# Altium PCB 模型主控V31.PcbDoc (part 1 of 2)
Units mil, origin at the board's own origin, x right, y up, seen from the top; angles counter-clockwise.
Board outline 1613.6 x 1060.03 mil, 4 copper layers (Top Layer, Mid-Layer 1, Mid-Layer 2, Bottom Layer); 72 components, 81 nets, 272 pads, 75 vias.
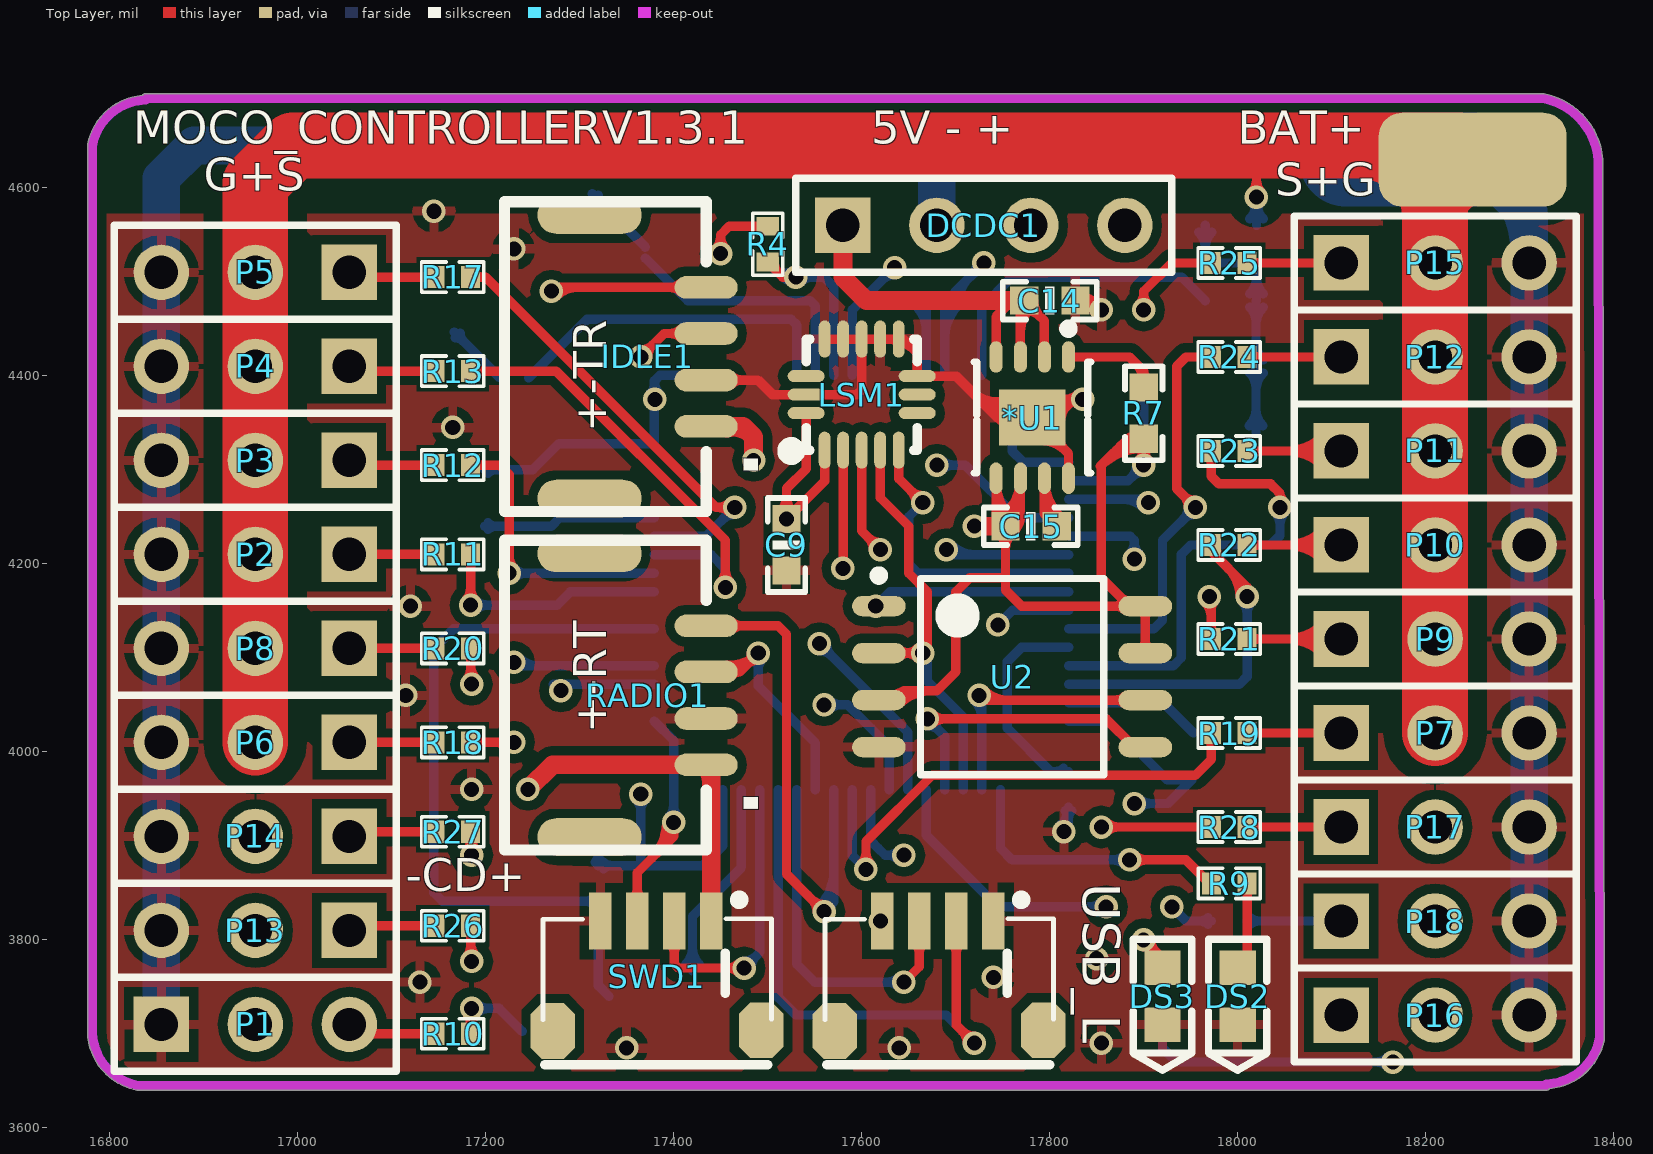
[diagram p0: Top Layer view]
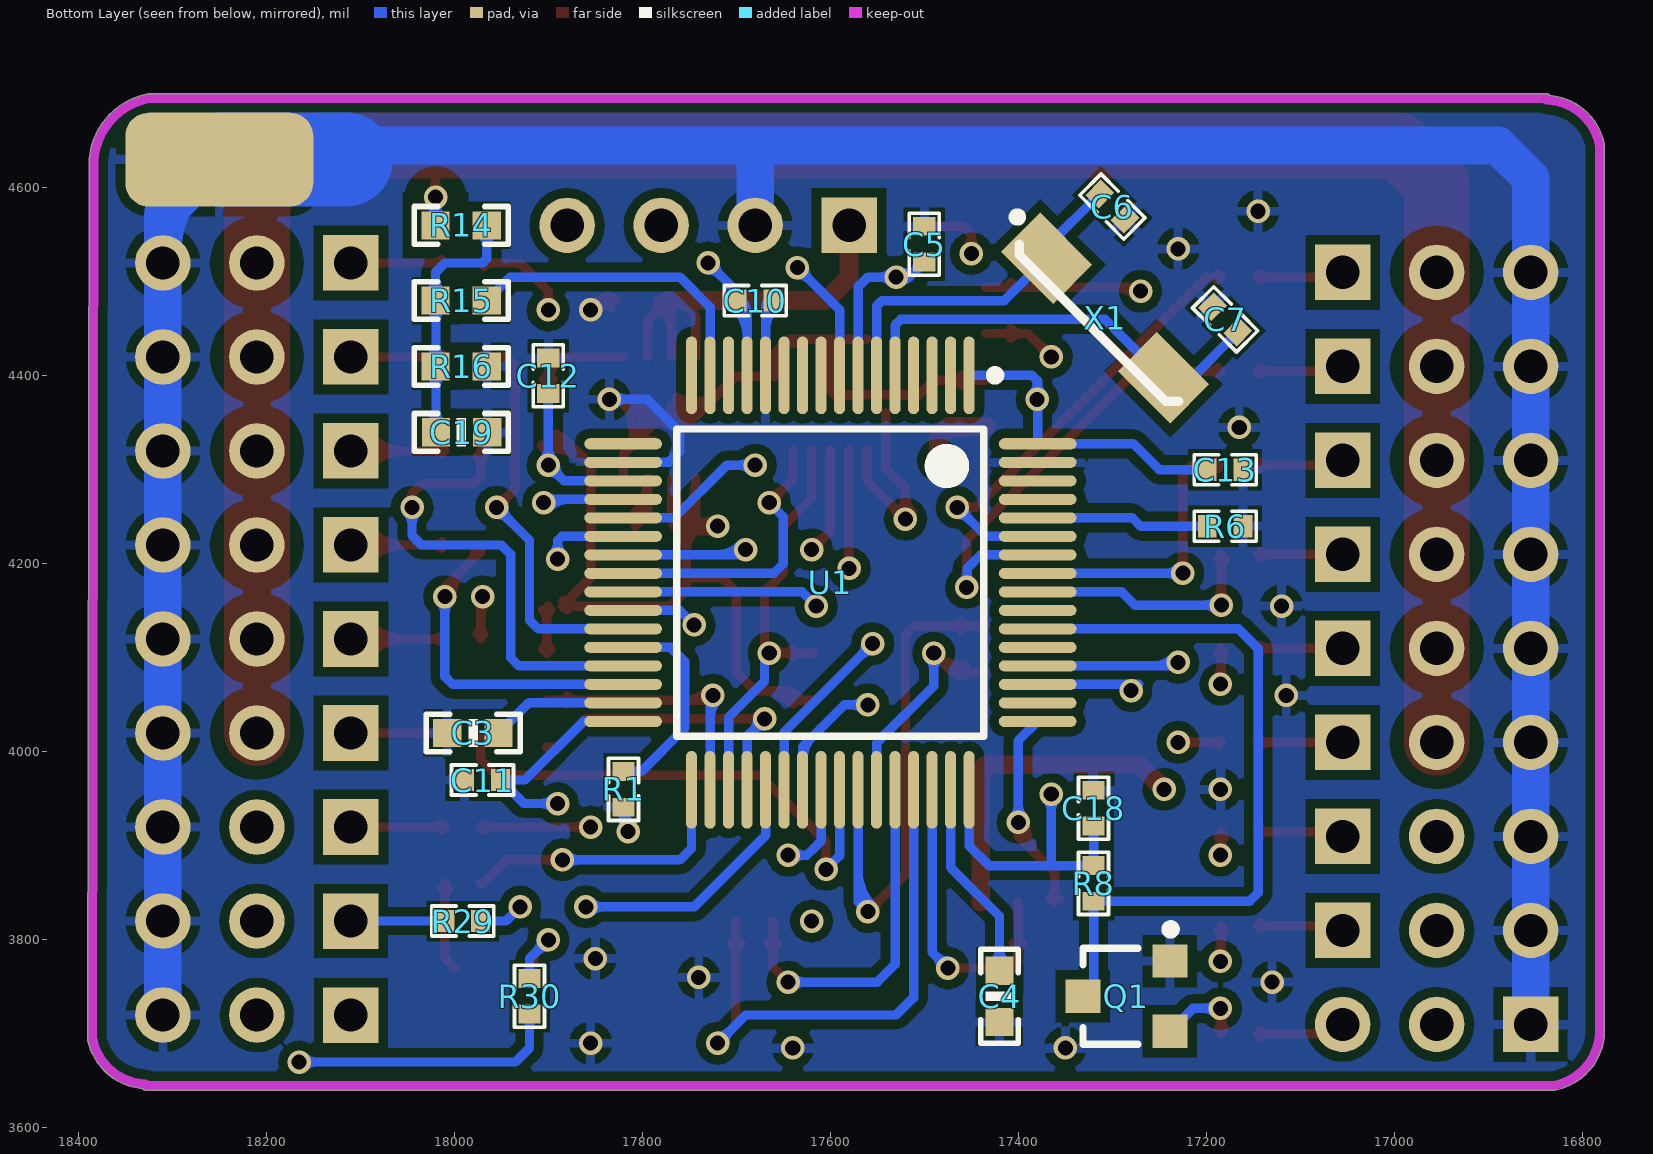
[diagram p1: Bottom Layer view, seen from below]
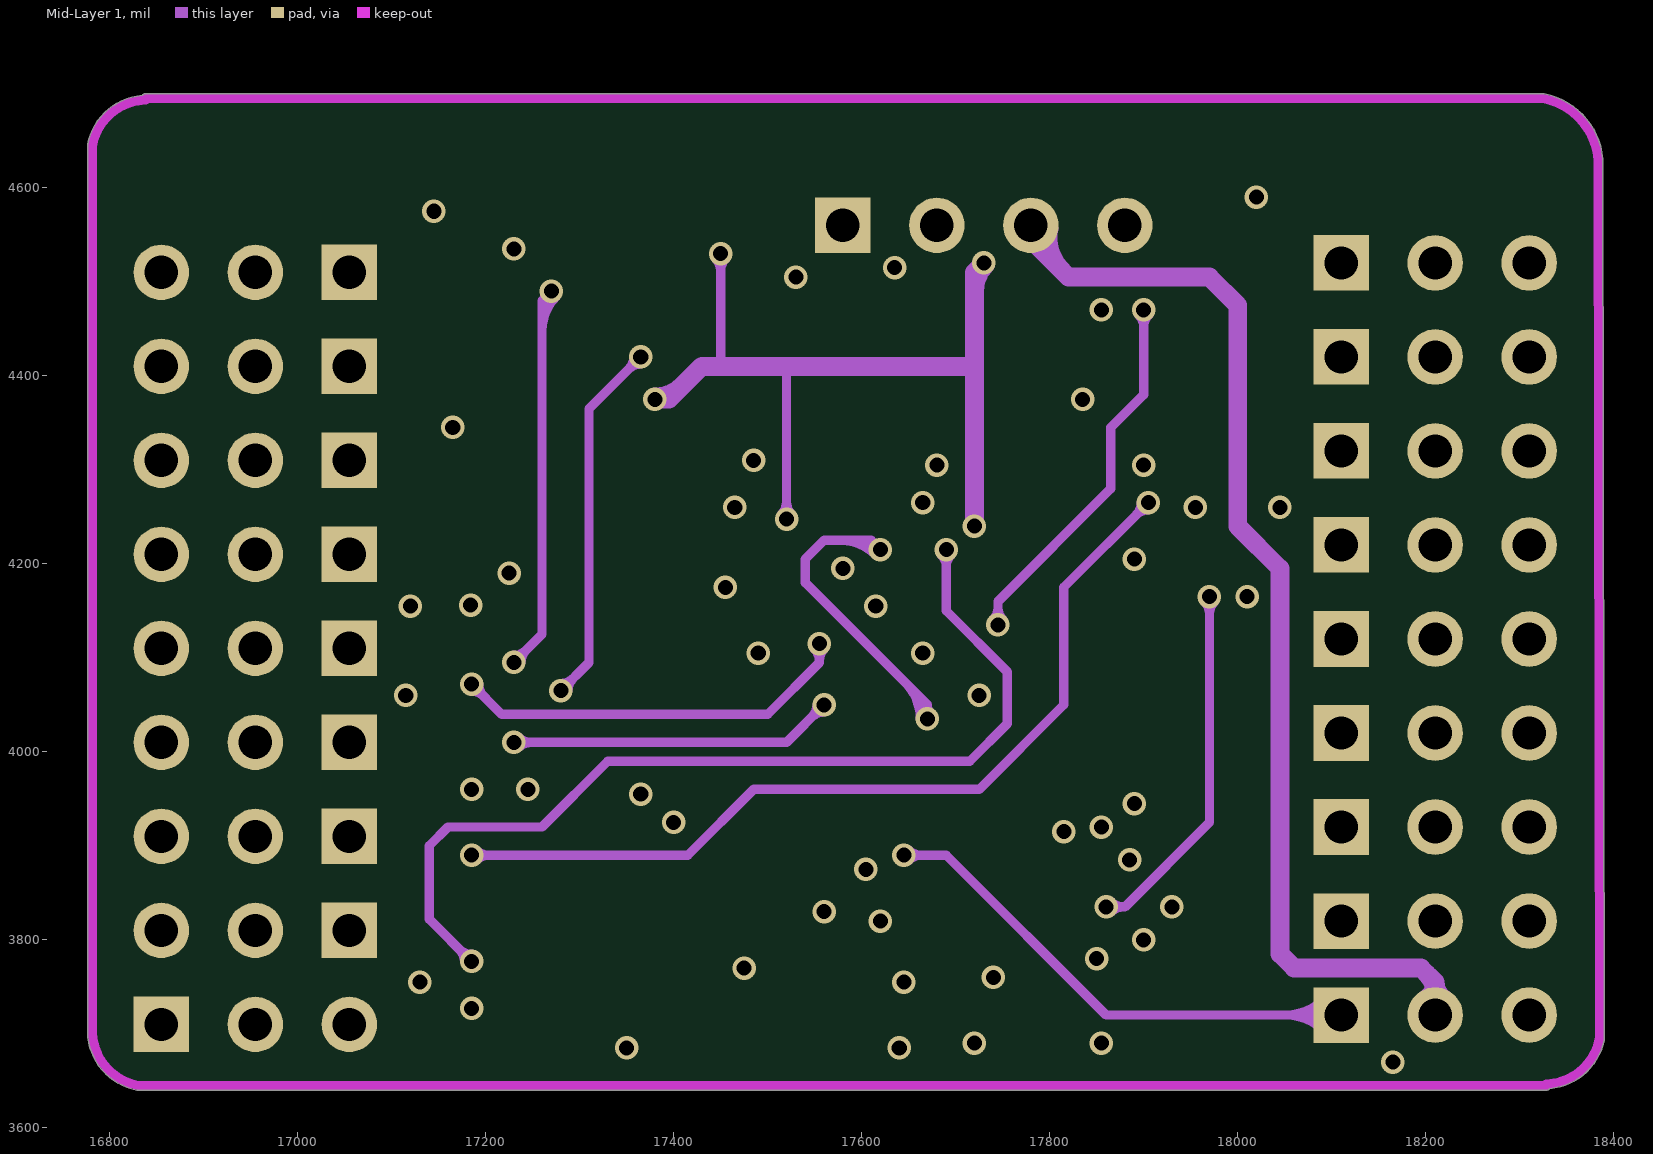
[diagram p2: Mid-Layer 1]
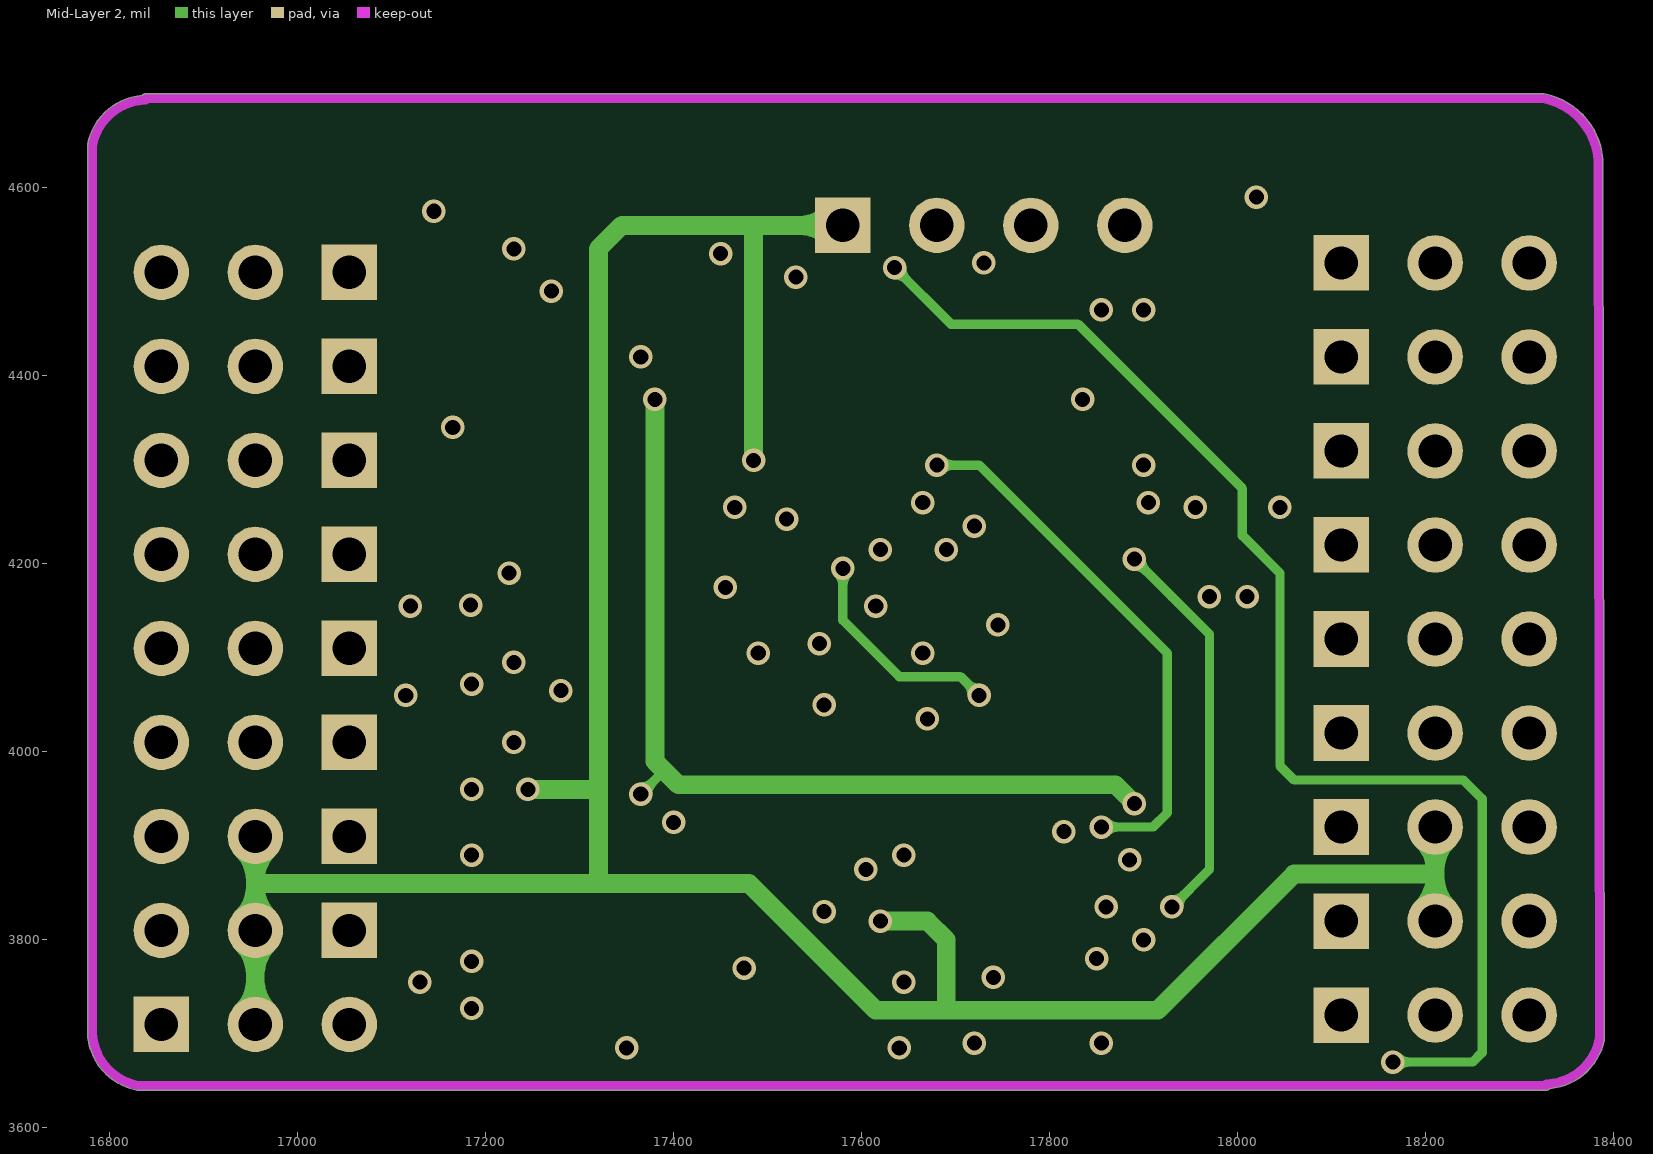
[diagram p3: Mid-Layer 2]
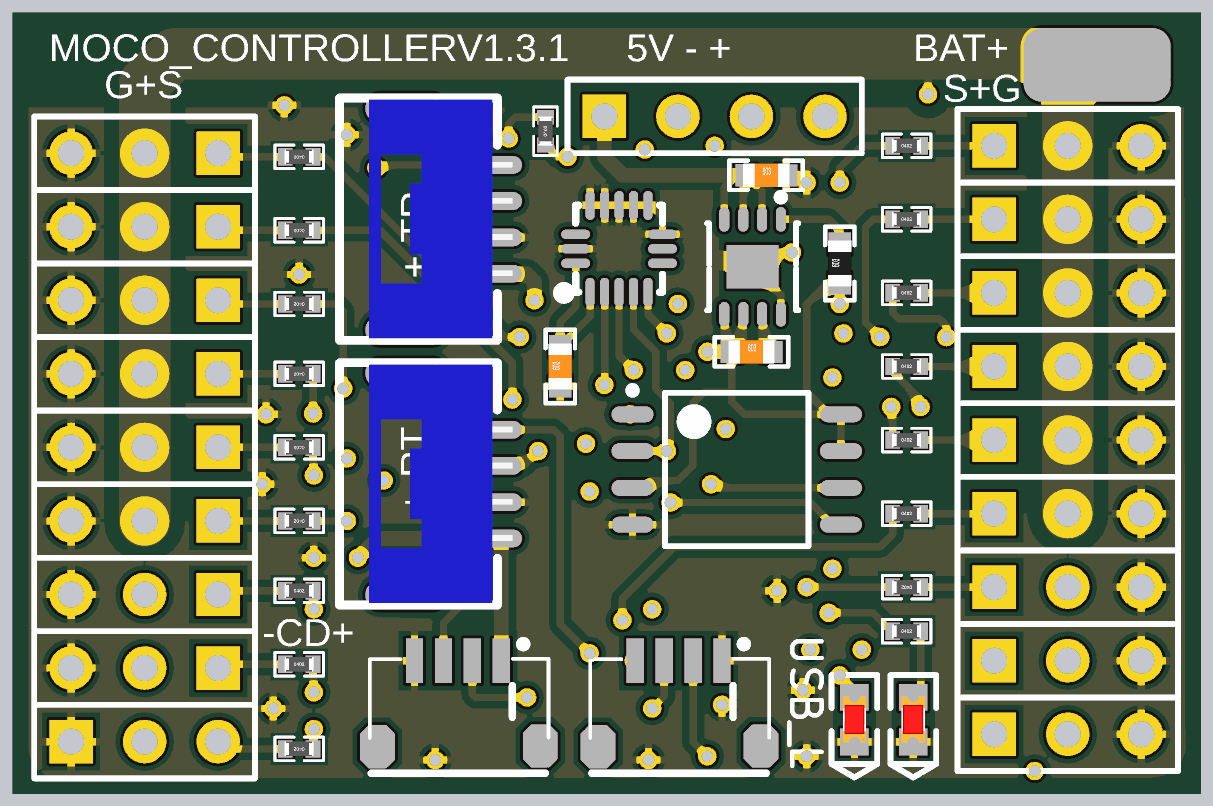
[diagram p5: 3D render of the assembled board from above, using the file's embedded part models]
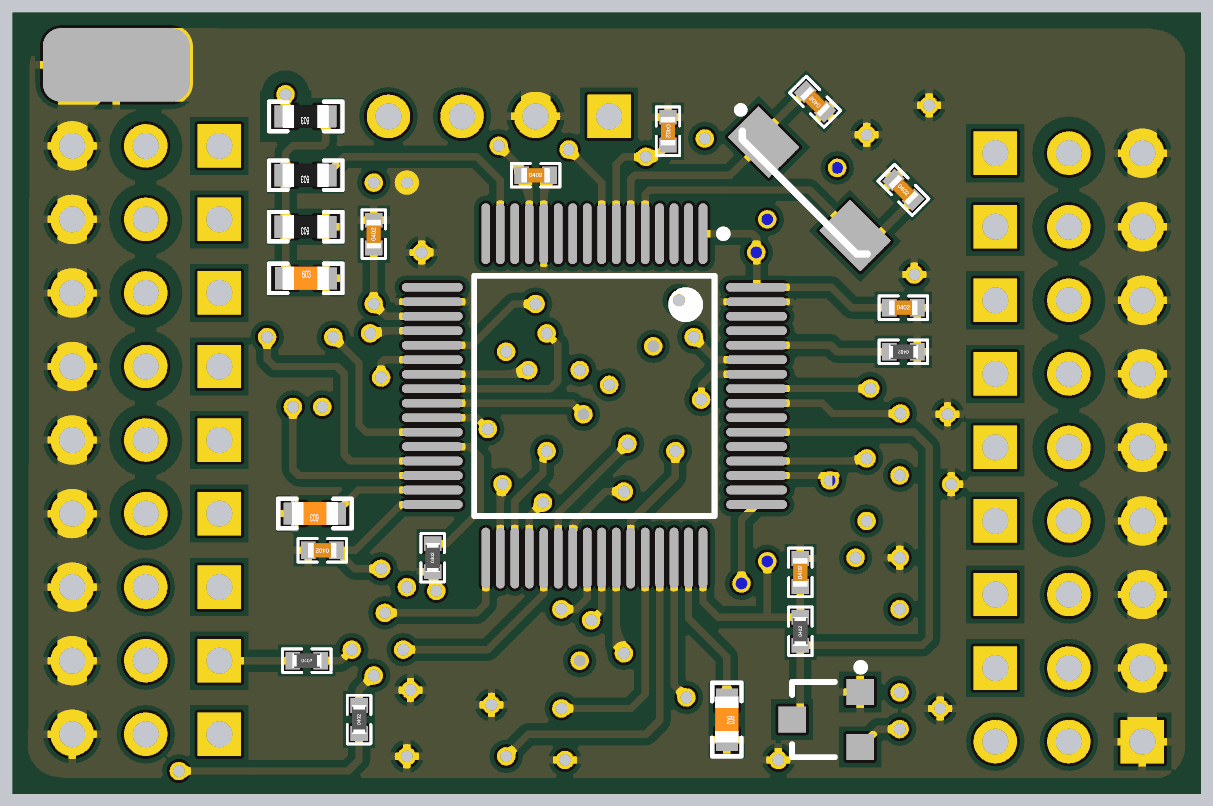
[diagram p6: 3D render of the assembled board from below, using the file's embedded part models]

## Layer stack, top to bottom
Top Layer: signal copper 1.4
Dielectric: core 12.6, FR-4, Dk 4.8
Mid-Layer 1: signal copper 1.4
Dielectric: prepreg 12.6, FR-4, Dk 4.8
Mid-Layer 2: signal copper 1.4
Dielectric: core 12.6, FR-4, Dk 4.8
Bottom Layer: signal copper 1.4

## Board outline
16776.54,3701.76 ccw(c16841.07,3703.5) 16829.07,3640.07 ccw(c16830,3645) 16830,3639.99 18328.11,3639.99 ccw(c18328.11,3645) 18331.92,3641.74 ccw(c18326.5,3706.07) 18389.71,3692.98 ccw(c18385.12,3695) 18390.14,3695 18390.14,3695.01 18388.38,4629.88 ccw(c18383.38,4630.3) 18388.4,4630.3 ccw(c18383.38,4630.3) 18388.38,4630.73 ccw(c18311.61,4624.23) 18325.93,4699.93 ccw(c18325,4695) 18325,4700.02 16838.44,4700.02 ccw(c16838.44,4695) 16834.63,4698.26 ccw(c16840.05,4633.93) 16776.62,4645.93 ccw(c16781.55,4645) 16776.54,4645 16776.54,3701.89 ccw(c16781.55,3701.89)

## Design rules (kind name [scope] priority, off if disabled: settings)
Clearance Clearance_2 [InNet('VCC_DJ') vs (InPolygon)] p1: gap=20
Clearance Clearance_1 [All vs (InPolygon)] p2: gap=10
Clearance [All] p3: gap=6
PolygonConnect [All] p1: connectstyle=Relief reliefconductorwidth=10 reliefentries=4 polygonreliefangle="90 Angle"
RoutingVias [All] p1: holewidth=28 width=50 viastyle="Through Hole" minholewidth=16 minwidth=25 maxholewidth=28 maxwidth=50
SilkscreenOverComponentPads [All] p1: minsilkscreentomaskgap=10
SolderMaskExpansion [All] p1: expansion=4
Width [All] p1: maxlimit=100 minlimit=10 preferedwidth=10 minimp=50.000000 maximp=50.000000 favimp=50.000000
27 further rules are at their usual default settings.

## Components (designator, comment, footprint, x,y, rotation, side; value= is the part's Value field where it differs from the comment)
*U1 "AS1364-BTDT-33" TDFN-8 17820,4420 r90 top
C3 "2.2UF" C0603 17980,4020 r0 bottom
C4 "2.2UF" C0603 17420,3740 r270 bottom
C5 "10NF" "C 0402" 17500,4540 r270 bottom
C6 "20PF" "C 0402" 17300,4580 r45 bottom
C7 "20PF" "C 0402" 17180,4460 r225 bottom
C9 "0.1UF" C0603 17520,4220 r90 top
C10 "0.1UF" "C 0402" 17680,4480 r180 bottom
C11 "0.1UF" "C 0402" 17970,3970 r0 bottom
C12 "0.1UF" "C 0402" 17900,4400 r90 bottom
C13 "0.1UF" "C 0402" 17180,4300 r180 bottom
C14 "4.7uf" C0603 17800,4480 r0 top
C15 "10nf" C0603 17780,4240 r0 top
C18 "0.1UF" "C 0402" 17320,3940 r90 bottom
C19 "100uF" C0603 17992.5,4339.94 r180 bottom
DCDC1 "Header 4" HDR1X4 17580,4560 r0 top
DS2 "LED1" 0603_LED 18000,3740 r90 top
DS3 "LED1" 0603_LED 17920,3740 r90 top
IDLE1 "Header 4" JST_GH_V4 17220,4420 r90 top
LSM1 "LSM6DS33" LSM6DS33 17600,4380 r90 top
P1 "Header 3" HDR1X3 16855,3710 r0 top
P2 "Header 3" HDR1X3 17055,4210 r180 top
P3 "Header 3" HDR1X3 17055,4310 r180 top
P4 "Header 3" HDR1X3 17055,4410 r180 top
P5 "Header 3" HDR1X3 17055,4510 r180 top
P6 "Header 3" HDR1X3 17055,4010 r180 top
P7 "Header 3" HDR1X3 18110,4020 r0 top
P8 "Header 3" HDR1X3 17055,4110 r180 top
P9 "Header 3" HDR1X3 18110,4120 r0 top
P10 "Header 3" HDR1X3 18110,4220 r0 top
P11 "Header 3" HDR1X3 18110,4320 r0 top
P12 "Header 3" HDR1X3 18110,4420 r0 top
P13 "Header 3" HDR1X3 17055,3810 r180 top
P14 "Header 3" HDR1X3 17055,3910 r180 top
P15 "Header 3" HDR1X3 18110,4520 r0 top
P16 "Header 3" HDR1X3 18110,3720 r0 top
P17 "Header 3" HDR1X3 18110,3920 r0 top
P18 "Header 3" HDR1X3 18110,3820 r0 top
Q1 "S8050" SOT-23R 17280,3740 r90 bottom
R1 "10K" "R 0402" 17820,3960 r90 bottom
R4 "10K" "R 0402" 17500,4540 r90 top
R6 "10K" "R 0402" 17180,4240 r0 bottom
R7 "100K" R0603 17900,4360 r90 top
R8 "10K" "R 0402" 17320,3860 r90 bottom
R9 "100R" "R 0402" 17991,3860 r0 top
R10 "560R" "R 0402" 17165,3700 r180 top
R11 "560R" "R 0402" 17165,4210 r180 top
R12 "560R" "R 0402" 17165,4305 r180 top
R13 "560R" "R 0402" 17165,4405 r180 top
R14 "10K" R0603 17992.5,4559.94 r0 bottom
R15 "1K" R0603 17992.5,4479.94 r0 bottom
R16 "1K" R0603 17992.5,4409.94 r0 bottom
R17 "560R" "R 0402" 17165,4505 r180 top
R18 "560R" "R 0402" 17165,4010 r180 top
R19 "560R" "R 0402" 17991,4020 r0 top
R20 "560R" "R 0402" 17165,4110 r180 top
R21 "560R" "R 0402" 17991,4120 r0 top
R22 "560R" "R 0402" 17991,4220 r0 top
R23 "560R" "R 0402" 17991,4320 r0 top
R24 "560R" "R 0402" 17991,4420 r0 top
R25 "560R" "R 0402" 17991,4520 r0 top
R26 "1K" "R 0402" 17165,3815 r0 top
R27 "1K" "R 0402" 17165,3915 r0 top
R28 "1K" "R 0402" 17991,3920 r180 top
R29 "1K" "R 0402" 17991,3820 r180 bottom
R30 "100R" "R 0402" 17920,3740 r90 bottom
RADIO1 "Header 4" JST_GH_V4 17220,4060 r90 top
SWD1 "Header 4" "SH1.0-4P - up" 17440,3820 r180 top
U1 "STM32F405RGT6" LQFP64_M 17600,4180 r270 bottom locked
U2 "W25X16" W25Q32FVZPIG 17760,4080 r0 top locked
USB_L "Header 4" "SH1.0-4P - up" 17740,3820 r180 top
X1 "8MHZ" PXCL 17370,4525 r315 bottom

## Footprints (in the part's own frame and the unit in brackets; to place one, negate y for a bottom-side part, rotate by r counter-clockwise, add the part's x,y. Pads: shape width x height; smd on the part's side, far side on the other; paste and mask are expansions set on the pad)
0603_LED [mm]
  rect 0.93x0.98 smd: 1(0.77,0) 2(-0.77,0)
  silkscreen extent -2,-0.79 1.53,0.79, body extent -0.8,-0.4 0.8,0.4, height 0.6
C0603 [mil]
  rect 30x30 smd: 1(-27,0) 2(27.5,-0.06)
  silkscreen extent -50,-20 50,20, body extent -31,-16 31,16, height 12
"C 0402" [mil]
  rect 20x23.62 smd: 1(-19,0) 2(19,0)
  silkscreen extent -33,-16 33,16, body extent -20,-10 20,10, height 20
HDR1X3 [mm] "Connector; Header; 3 Position"
  rect 1.5x1.5 hole 0.9: 1(0,0)
  round 1.5 hole 0.9: 2(2.54,0) 3(5.08,0)
  silkscreen extent -1.27,-1.27 6.35,1.27
HDR1X4 [mm] "Connector; Header; 4 Position"
  rect 1.5x1.5 hole 0.9: 1(0,0)
  round 1.5 hole 0.9: 2(2.54,0) 3(5.08,0) 4(7.62,0)
  silkscreen extent -1.27,-1.27 8.89,1.27
JST_GH_V4 [mil]
  rrect100% 24x67 smd: 1(-73.82,-214.57) 2(-24.61,-214.57) 3(25,-214.57) 4(74,-214.57)
  rrect100% 40x111 smd: GND(-150.59,-90.55) GND(151,-90.55)
  silkscreen extent -164,-215 165,0, body extent -162,-235 163,-40, height 165
LQFP64_M [mm] "Thin QFP, 64-Leads, Body 10x10mm, Pitch 0.5mm, IPC Low Density"
  oval 2.1x0.3 smd: 1(-5.6,3.75) 2(-5.6,3.25) 3(-5.6,2.75) 4(-5.6,2.25) 5(-5.6,1.75) 6(-5.6,1.25) 7(-5.6,0.75) 8(-5.6,0.25) 9(-5.6,-0.25) 10(-5.6,-0.75) 11(-5.6,-1.25) 12(-5.6,-1.75) 13(-5.6,-2.25) 14(-5.6,-2.75) 15(-5.6,-3.25) 16(-5.6,-3.75) 33(5.6,-3.75) 34(5.6,-3.25) 35(5.6,-2.75) 36(5.6,-2.25) 37(5.6,-1.75) 38(5.6,-1.25) 39(5.6,-0.75) 40(5.6,-0.25) 41(5.6,0.25) 42(5.6,0.75) 43(5.6,1.25) 44(5.6,1.75) 45(5.6,2.25) 46(5.6,2.75) 47(5.6,3.25) 48(5.6,3.75)
  oval 0.3x2.1 smd: 17(-3.75,-5.6) 18(-3.25,-5.6) 19(-2.75,-5.6) 20(-2.25,-5.6) 21(-1.75,-5.6) 22(-1.25,-5.6) 23(-0.75,-5.6) 24(-0.25,-5.6) 25(0.25,-5.6) 26(0.75,-5.6) 27(1.25,-5.6) 28(1.75,-5.6) 29(2.25,-5.6) 30(2.75,-5.6) 31(3.25,-5.6) 32(3.75,-5.6) 49(3.75,5.6) 50(3.25,5.6) 51(2.75,5.6) 52(2.25,5.6) 53(1.75,5.6) 54(1.25,5.6) 55(0.75,5.6) 56(0.25,5.6) 57(-0.25,5.6) 58(-0.75,5.6) 59(-1.25,5.6) 60(-1.75,5.6) 61(-2.25,5.6) 62(-2.75,5.6) 63(-3.25,5.6) 64(-3.75,5.6)
  silkscreen extent -5.72,-4.15 4.15,4.57, body extent -5,-5 5,5, height 1.6
LSM6DS33 [mm]
  oval 1x0.32 smd: 1(-1.5,1) 2(-1.5,0.5) 3(-1.5,0) 4(-1.5,-0.5) 5(-1.5,-1) 9(1.5,-1) 10(1.5,-0.5) 11(1.5,0) 12(1.5,0.5) 13(1.5,1)
  oval 0.32x1 smd: 6(-0.5,-1.5) 7(0,-1.5) 8(0.5,-1.5) 14(0.5,1.5) 15(0,1.5) 16(-0.5,1.5)
  silkscreen extent -1.65,-1.5 1.5,2.03, body extent -1.5,-1.5 1.5,1.5, height 0.75
PXCL [mm]
  rect 1.5x2 smd: 1(0,0) 2(0.051,4.521)
  silkscreen extent -0.34,-1.45 0.46,5.26
R0603 [mil]
  rect 30x30 smd: 1(-27,0) 2(27.5,-0.06)
  silkscreen extent -50,-20 50,20, body extent -31,-16 31,16, height 12
"R 0402" [mil]
  rect 20x23.62 smd: 1(-19,0) 2(19,0)
  silkscreen extent -33,-16 33,16, body extent -20,-10 20,10, height 12
"SH1.0-4P - up" [mm]
  rect 0.6x1.55 smd: 1(0,0) 2(1,0) 3(2,0) 4(3,0)
  oct 1.2x1.5 smd: 1.(4.279,2.972) A(-1.346,2.946)
  silkscreen extent -1.63,-0.7 4.55,3.89
SOT-23R [mm]
  rect 0.9x0.95 smd: 1(0.95,-1.048) 2(-0.95,-1.048) 3(0,1.302)
  silkscreen extent -1.3,-1.19 1.93,1.3
TDFN-8 [mm] "QFN, 8-Leads, Body 3.0x3.0mm (max), Pitch 0.65mm, IPC Medium Density"
  oval 0.85x0.35 smd: 1(0,0) 2(0,0.65) 3(0,1.3) 4(0,1.956) 5(-3.277,1.956) 6(-3.277,1.295) 7(-3.277,0.65) 8(-3.277,0.001)
  rect 1.5x1.8 smd: 9(-1.636,0.975)
  silkscreen extent -3.14,-0.6 0.89,2.55, body extent -3.14,-0.52 -0.14,2.48, height 0.8
W25Q32FVZPIG [mm] "SOP, 8-Leads, Body 5.3x5.3mm (max), Pitch 1.27mm, IPC Medium Density"
  oval 1.45x0.55 smd: 1(-3.6,1.905) 2(-3.6,0.635) 3(-3.6,-0.635) 4(-3.6,-1.905) 5(3.6,-1.905) 6(3.6,-0.635) 7(3.6,0.635) 8(3.6,1.905)
  silkscreen extent -3.72,-2.65 2.47,2.85, body extent -2.64,-2.64 2.64,2.64, height 2.65

## Part data
*U1: library part AS1364-3.3V
C3 C4: library part CAP1, "胆电容"
C5 C9 C10 C11 C12 C13 C14 C15 C18 C19: library part CAP, "Capacitor"
C6 C7: library part C2, "0805"
DCDC1 IDLE1 RADIO1 SWD1 USB_L: "Header, 4-Pin"
DS2 DS3: library part LED2, "Typical RED, GREEN, YELLOW, AMBER GaAs LED"
P1 P2 P3 P4 P5 P6 P7 P8 P9 P10 P11 P12 P13 P14 P15 P16 P17 P18: "Header, 3-Pin"
Q1: library part NPN, "8050/BCW846/BCW847"
R1 R4 R6 R8 R9 R10 R11 R12 R13 R14 R15 R16 R17 R18 R19 R20 R21 R22 R23 R24 R25 R30: library part Res2, "0603"
R7 R26 R27 R28 R29: library part Res1, "Resistor"
U2: "W25X16;SST25VF016;MX25L1605"
X1: library part XTAL, "Crystal Oscillator"

## Free pads (board coordinates)
  rrect50% 200x100 smd: 0(18250,4630)
  rrect50% 200x100 smd far side: 0(18250,4630)

## Via types
v1: diameter 25, hole 16, Top Layer to Bottom Layer, 75 vias

## Nets (pads, with @x,y where several pads share a name; then routed paths per layer and width w, separated by ;. In a path a pad name is that pad's centre, name@x,y a point inside that pad or via, vN(x,y) a via of type N, cw(c..) or ccw(c..) an arc to the next point about the centre after c; other vN are vias at no path point)
3.3V: *U1.5 *U1.6 C9.2 C10.1 C11.1 C12.1 C13.1 C15.1 C18.1 LSM1.1 LSM1.16 R4.2 R7.1 R8.2 U1.1 U1.13 U1.19 U1.32 U1.48 U1.64 U2.3 U2.7 U2.8 | length 5548.4
  Top Layer w10: v1@17444.7,4535.3 ccw(c17431.89,4548.11) 17450,4548.11 ccw(c17468.11,4548.11) v1@17455.3,4535.3 ; v1(17450,4530) 17450,4550 17459,4559 R4.2@17500,4559 ; R4.2@17494.65,4555.46 ccw(c17486.12,4546.93) 17486.12,4559 ccw(c17486.12,4571.07) R4.2@17494.65,4562.54 ; C9.2@17512.99,4254.57 ccw(c17495.92,4271.64) 17520.06,4271.64 ccw(c17544.21,4271.64) C9.2@17527.14,4254.57 ; C9.2@17514.76,4252.8 ccw(c17501.96,4265.61) 17520.06,4265.61 ccw(c17538.17,4265.61) C9.2@17525.37,4252.8 ; C9.2@17520.06,4255 ccw(c17520.06,4273.11) 17532.87,4260.3 ccw(c17545.67,4247.5) C9.2@17527.56,4247.5 ; LSM1.16@17540.94,4360.31 17540.94,4350 17540.94,4300.94 17520.06,4280.06 v1(17520.06,4247.5) 17560.63,4288.07 LSM1.1@17560.63,4320.94 ; U2.3@17618.27,4055 17635,4055 17645,4065 ; U2.3@17633.03,4057.95 cw(c17650.05,4040.93) 17650.05,4065 ; U2.3@17635.98,4060.83 ccw(c17635.98,4072.52) 17644.25,4064.25 ; U2.3@17640.1,4050.88 cw(c17674.19,4016.79) 17674.19,4065 ; U2.3@17641.77,4055.69 cw(c17652.98,4057.01) 17645,4065 ; 17743,4264.14 ccw(c17777.14,4264.14) C15.1@17753,4240 ; *U1.5@17743,4288.28 ccw(c17801.28,4288.28) C15.1@17760.07,4247.07 ; *U1.5@17743,4291 17743,4242 17745,4240 C15.1@17753,4240 ; C15.1@17745.93,4232.93 cw(c17728.86,4215.86) 17753,4215.86 cw(c17777.14,4215.86) C15.1@17760.07,4232.93 ; C15.1@17747.13,4248.09 ccw(c17715.98,4291) *U1.6@17769,4291 17769,4256 ; C15.1@17753.47,4249.99 ccw(c17754.43,4270.56) 17769,4256 ; C15.1@17758.87,4231.91 ccw(c17744.46,4251.77) 17769,4251.77 ; C15.1@17762.99,4240.47 cw(c17783.56,4241.43) 17769,4256 ; 17769,4271.38 cw(c17730.22,4271.38) C15.1@17753,4240 ; 17853.91,4303.91 cw(c17900,4257.82) R7.1@17900,4323 ; 17870.98,4320.98 cw(c17900,4291.96) R7.1@17900,4333 ; 17873.37,4166.63 cw(c17861.75,4155) U2.8@17878.19,4155 ; 17874.5,4324.5 cw(c17884.49,4314.51) R7.1@17893.58,4325.34 ; 17875.75,4164.25 ccw(c17884.02,4172.52) U2.8@17884.02,4160.83 ; U2.8@17879.9,4150.88 ccw(c17869.95,4140.93) 17869.95,4155 ccw(c17869.95,4169.07) U2.8@17879.9,4159.12 ; 17882.22,4332.22 cw(c17891.54,4322.9) R7.1@17900,4333 ; R7.1@17891.26,4328.14 ccw(c17883,4323.55) 17883,4333 ; R7.1@17891.26,4337.86 cw(c17883,4342.45) 17883,4333 ; R7.1@17892.93,4325.93 cw(c17875.86,4308.86) 17900,4308.86 cw(c17924.14,4308.86) R7.1@17907.07,4325.93 ; v1@17894.7,4310.3 ccw(c17881.89,4323.11) 17900,4323.11 ccw(c17918.11,4323.11) v1@17905.3,4310.3 ; U2.7@17897.61,4109.12 ccw(c17887.67,4119.07) 17901.73,4119.07 ccw(c17915.8,4119.07) U2.7@17905.85,4109.12 ; U2.8@17900,4155 17900,4146.73 17901.73,4145 17901.73,4140 U2.7@17901.73,4105 ; v1(17900,4305) R7.1@17900,4333 ; 17645,4065 17680,4065 17700,4085 17700,4170 17715,4185 17753,4185 ; 17753,4185 17753,4172 17770,4155 17885,4155 17855,4185 17855,4305 17883,4333 ; 17753,4185 C15.1@17753,4240 ; C15.1@17753,4240 17769,4256 ; 17883,4333 R7.1@17900,4333 ; U2.8@17897.61,4150.88 cw(c17887.67,4140.93) 17901.73,4140.93 ; U2.8@17897.61,4150.88 cw(c17887.67,4140.93) 17901.73,4140.93 ; U2.8@17897.61,4150.88 cw(c17887.67,4140.93) 17901.73,4140.93 ; 17901.73,4140.93 cw(c17915.8,4140.93) U2.8@17905.85,4150.88 ; 17901.73,4140.93 cw(c17915.8,4140.93) U2.8@17905.85,4150.88 ; 17901.73,4140.93 cw(c17915.8,4140.93) U2.8@17905.85,4150.88
  Top Layer w20: v1(17720,4240) C15.1@17753,4240
  Mid-Layer 1 w10: v1@17444.7,4524.7 cw(c17431.89,4511.89) 17450,4511.89 cw(c17468.11,4511.89) v1@17455.3,4524.7 ; 17450,4415 v1(17450,4530) ; v1@17514.76,4252.8 ccw(c17501.96,4265.61) 17520.06,4265.61 ccw(c17538.17,4265.61) v1@17525.37,4252.8 ; v1(17520.06,4247.5) 17520.06,4404.94
  Mid-Layer 1 w20: v1(17380,4375) 17395,4375 17430,4410 17720,4410 ; v1@17380,4377.5 ccw(c17380,4419.75) 17409.87,4389.87 ; v1(17720,4240) 17720,4410 ; 17720,4489.82 cw(c17760.18,4489.82) v1@17731.77,4518.23 ; v1(17730,4520) 17720,4510 17720,4410
  Mid-Layer 2 w10: v1(17365,3955) 17390,3980 ; v1@17365,3962.5 ccw(c17365,3980.61) 17377.8,3967.8 ccw(c17390.61,3955) v1@17372.5,3955
  Mid-Layer 2 w20: v1(17380,4375) 17380,3990 17390,3980 17405,3965 17870,3965 v1(17890,3945)
  Bottom Layer w10: C13.1@17199,4300 17250,4300 17277.64,4327.64 U1.64@17379.53,4327.64 17379.53,4394.53 17385.47,4400.47 U1.1@17452.36,4400.47 ; C13.1@17202.54,4296.46 cw(c17211.07,4287.93) 17211.07,4300 cw(c17211.07,4312.07) C13.1@17202.54,4303.54 ; R8.2@17316.46,3882.54 ccw(c17307.93,3891.07) 17320,3891.07 ccw(c17332.07,3891.07) R8.2@17323.54,3882.54 ; C18.1@17316.46,3917.46 cw(c17307.93,3908.93) 17320,3908.93 cw(c17332.07,3908.93) C18.1@17323.54,3917.46 ; C18.1@17320,3921 R8.2@17320,3879 17365,3879 ; R8.2@17325.35,3875.46 cw(c17333.88,3866.93) 17333.88,3879 cw(c17333.88,3891.07) R8.2@17325.35,3882.54 ; v1@17359.7,3949.7 cw(c17346.89,3936.89) 17365,3936.89 cw(c17383.11,3936.89) v1@17370.3,3949.7 ; v1(17365,3955) 17365,3879 ; v1@17374.7,4380.3 ccw(c17363.03,4391.97) 17379.53,4391.97 ; 17379.53,4394.25 ccw(c17399.25,4394.25) v1@17385.3,4380.3 ; U1.48@17452.36,3959.53 17452.36,3900 17431.36,3879 17365,3879 ; U1.13@17688.58,4400.47 17688.58,4468.58 C10.1@17700,4480 ; U1.13@17688.58,4440.97 cw(c17736.22,4440.97) C10.1@17702.54,4474.65 ; 17688.58,4465.11 cw(c17712.08,4465.11) C10.1@17695.46,4481.72 ; C10.1@17699,4480 17699,4489 v1(17730,4520) ; C10.1@17704,4481.81 cw(c17733.43,4481.81) 17712.62,4502.62 ; v1@17722.5,4520 cw(c17704.39,4520) 17717.2,4507.2 cw(c17730,4494.39) v1@17730,4512.5 ; U1.32@17820.47,4032.36 17862.64,4032.36 17925,3970 C11.1@17951,3970 17926,3945 v1(17890,3945) ; U1.19@17820.47,4288.27 17883.27,4288.27 v1(17900,4305) C12.1@17900,4381 ; v1@17892.5,4305 cw(c17874.39,4305) 17887.2,4292.2 cw(c17900,4279.39) v1@17900,4297.5 ; v1@17894.7,4310.3 ccw(c17881.89,4323.11) 17900,4323.11 ccw(c17918.11,4323.11) v1@17905.3,4310.3 ; v1@17895.3,3939.7 cw(c17908.11,3926.89) 17908.11,3945 cw(c17908.11,3963.11) v1@17895.3,3950.3 ; C12.1@17896.46,4377.46 cw(c17887.93,4368.93) 17900,4368.93 cw(c17912.07,4368.93) C12.1@17903.54,4377.46 ; C11.1@17947.46,3966.46 ccw(c17938.93,3957.93) 17938.93,3970 ccw(c17938.93,3982.07) C11.1@17947.46,3973.54
5V: *U1.2 *U1.3 *U1.4 C14.1 DCDC1.1 IDLE1.1 P1.2 P13.2 P14.2 P17.2 P18.2 RADIO1.1 SWD1.1 USB_L.4 | length 4612.6
  Top Layer w10: *U1.4@17743,4420 17743,4463 C14.1@17760,4480 ; 17752.13,4472.13 cw(c17771.26,4453) C14.1@17773,4480 ; *U1.3@17768.82,4420 17768.82,4475.82 C14.1@17773,4480 ; 17768.82,4445.76 cw(c17807.24,4445.76) C14.1@17780.07,4472.93 ; C14.1@17773,4470 cw(c17773,4445.86) 17790.07,4462.93 cw(c17807.14,4480) C14.1@17783,4480 ; *U1.2@17794.41,4420 17794.41,4458.59 C14.1@17773,4480
  Top Layer w20: v1(17245,3960) 17271.18,3986.18 RADIO1.1@17434.57,3986.18 17440,3980.75 SWD1.1@17440,3840 ; RADIO1.1@17433.15,3984.77 cw(c17416.62,3968.24) 17440,3968.24 ; IDLE1.1@17434.57,4346.18 17473.82,4346.18 17485,4335 v1(17485,4310) ; IDLE1.1@17456.59,4344.25 cw(c17463.65,4318.26) 17482.69,4337.31 ; DCDC1.1@17580,4560 17580,4505 17605,4480 17760,4480 C14.1@17773,4480
  Mid-Layer 2 w20: P1.2@16941.19,3723.81 ccw(c16907.86,3757.14) 16955,3757.14 ccw(c17002.14,3757.14) P1.2@16968.81,3723.81 ; P13.2@16941.19,3796.19 cw(c16907.86,3762.86) 16955,3762.86 cw(c17002.14,3762.86) P13.2@16968.81,3796.19 ; P13.2@16941.19,3823.81 ccw(c16907.86,3857.14) 16955,3857.14 ccw(c17002.14,3857.14) P13.2@16968.81,3823.81 ; P14.2@16941.19,3896.19 cw(c16907.86,3862.86) 16955,3862.86 cw(c17002.14,3862.86) P14.2@16968.81,3896.19 ; P1.2@16955,3710 P13.2@16955,3810 P14.2@16955,3910 ; 16960,3860 17480,3860 17615,3725 17665,3725 17690,3725 ; v1(17245,3960) 17315,3960 ; 17320,3865 17320,4535 17345,4560 DCDC1.1@17580,4560 ; v1(17485,4310) 17485,4555 ; DCDC1.1@17566.19,4546.19 ccw(c17532.86,4512.86) 17532.86,4560 ccw(c17532.86,4607.14) DCDC1.1@17566.19,4573.81 ; v1(17620,3820) 17670,3820 17690,3800 17690,3725 ; P18.2@18196.19,3833.81 ccw(c18162.86,3867.14) 18210,3867.14 ccw(c18257.14,3867.14) P18.2@18223.81,3833.81 ; P17.2@18196.66,3905.74 cw(c18167.92,3875) 18210,3875 ; P18.2@18210,3820 18210,3875 ; P17.2@18210,3920 18210,3875 ; P17.2@18223.34,3905.74 ccw(c18252.08,3875) 18210,3875 ; 17690,3725 17915,3725 18060,3870 18205,3870 18210,3875
BAT: R15.1 U1.15 | length 333.7
  Bottom Layer w10: U1.15@17727.95,4400.47 17727.95,4472.95 17760,4505 17940.44,4505 R15.1@17965.5,4479.94
BEEP: U1.55
CAN_RX: U1.61
CAN_TX: U1.62
CS1: LSM1.5 U1.24 | length 340.9
  Top Layer w10: LSM1.5@17639.37,4320.94 17639.37,4290.63 v1(17665,4265) ; v1@17657.5,4265 ccw(c17639.39,4265) 17652.2,4277.8 ccw(c17665,4290.61) v1@17665,4272.5
  Bottom Layer w10: v1(17665,4265) 17650,4250 17650,4200 17660.16,4189.84 U1.24@17820.47,4189.84
CS2: U1.25 U2.1 | length 211.8
  Bottom Layer w10: v1(17615,4155) 17630.16,4170.16 U1.25@17820.47,4170.16
CS3: U1.53
CS4: U1.2
CS5: U1.50
DM: U1.44 USB_L.3 | length 433.4
  Top Layer w10: v1(17645,3755) 17661.26,3771.26 USB_L.3@17661.26,3820 ; USB_L.3@17656.44,3796.48 cw(c17644.82,3784.86) 17661.26,3784.86 cw(c17677.7,3784.86) USB_L.3@17666.08,3796.48
  Bottom Layer w10: U1.44@17531.1,3959.53 17531.1,3870 17531.1,3773.9 17550,3755 v1(17645,3755) ; v1@17639.7,3749.7 ccw(c17626.89,3736.89) 17626.89,3755 ccw(c17626.89,3773.11) v1@17639.7,3760.3
DP: U1.45 USB_L.2 | length 670.4
  Top Layer w10: USB_L.2@17695.81,3796.48 cw(c17684.19,3784.86) 17700.63,3784.86 cw(c17717.07,3784.86) USB_L.2@17705.45,3796.48 ; USB_L.2@17700.63,3820 17700.63,3709.37 v1(17720,3690) ; v1@17712.5,3690 ccw(c17694.39,3690) 17707.2,3702.8 ccw(c17720,3715.61) v1@17720,3697.5
  Bottom Layer w10: U1.45@17511.42,3959.53 17511.42,3738.58 17530,3720 17690,3720 v1(17720,3690) ; v1@17712.5,3690 ccw(c17694.39,3690) 17707.2,3702.8 ccw(c17720,3715.61) v1@17720,3697.5
EN_POWER: P16.1 U1.40 | length 836.2
  Mid-Layer 1 w10: v1@17640,3890 17690,3890 17860,3720 P16.1@18110,3720 ; v1@17650.3,3884.7 cw(c17663.11,3871.89) 17663.11,3890 cw(c17663.11,3908.11) v1@17650.3,3895.3 ; P16.1@18092.66,3702.66 ccw(c18050.79,3660.79) 18050.79,3720 ccw(c18050.79,3779.21) P16.1@18092.66,3737.34 ; P16.1@18099.73,3709.73 ccw(c18074.93,3684.93) 18074.93,3720 ccw(c18074.93,3755.07) P16.1@18099.73,3730.27
  Bottom Layer w10: U1.40@17609.84,3959.53 17609.84,3905.16 17617.5,3897.5 17625,3890 v1@17640,3890 ; v1@17639.7,3884.7 ccw(c17626.89,3871.89) 17626.89,3890 ccw(c17626.89,3908.11) v1@17639.7,3895.3
  other v1: 17645,3890
GND: *U1.8 *U1.9 C3.2 C4.2 C5.1 C6.1 C7.1 C9.1 C10.2 C11.2 C12.2 C13.2 C14.2 C18.2 C19.2 DCDC1.2 DS2.2 DS3.2 IDLE1.2 LSM1.8 LSM1.9 LSM1.10 LSM1.11 LSM1.12 LSM1.13 LSM1.15 P1.1 P2.3 P3.3 P4.3 P5.3 P6.3 P7.3 P8.3 P9.3 P10.3 P11.3 P12.3 P13.3 P14.3 P15.3 P16.3 P17.3 P18.3 pad.0@18250,4630 Q1.1 R1.1 R6.1 R16.1 RADIO1.2 SWD1.4 U1.12 U1.18 U1.63 U2.4 USB_L.1 | length 5131.9
  Top Layer w10: IDLE1.2@17434.57,4395.39 17489.61,4395.39 17505,4380 LSM1.15@17540.94,4380 17595,4380 17600,4385 LSM1.11@17600,4439.06 ; IDLE1.2@17461.02,4390.44 cw(c17472.97,4378.49) 17472.97,4395.39 cw(c17472.97,4412.29) IDLE1.2@17461.02,4400.34 ; LSM1.13@17560.63,4439.06 LSM1.12@17580.31,4439.06 LSM1.11@17600,4439.06 ; LSM1.9@17638.06,4434.27 cw(c17640.88,4415.77) 17654.11,4429 ; 17715.97,4384.03 ccw(c17744.56,4412.62) *U1.9@17763.95,4377.13 ; 17725.42,4374.58 ccw(c17751.24,4400.4) *U1.9@17768.74,4368.36 ; 17734.86,4365.14 ccw(c17757.91,4388.19) *U1.9@17773.54,4359.58 ; 17744.31,4355.69 ccw(c17764.58,4375.97) *U1.9@17778.33,4350.81 ; *U1.9@17751.89,4349.73 ccw(c17744.39,4347.88) 17744.39,4355.61 ; *U1.9@17751.89,4361.48 cw(c17744.39,4363.33) 17744.39,4355.61 ; *U1.9@17788.73,4331.11 cw(c17790.57,4293.74) 17817.02,4320.2 cw(c17835.78,4338.96) *U1.9@17810.7,4347.61 ; *U1.9@17792.03,4355.26 cw(c17813.38,4353.59) *U1.9@17813.38,4375 ; *U1.9@17801.25,4350.87 ccw(c17818.97,4344.76) *U1.9@17805.72,4331.51 ; *U1.9@17802,4354.48 cw(c17824.19,4352.75) v1@17824.19,4375 ; *U1.9@17811.97,4353.7 cw(c17835,4351.9) v1(17835,4375) 17801.01,4375 *U1.9@17781.61,4355.61 ; *U1.8@17819.98,4291 17819.98,4317.24 *U1.9@17781.61,4355.61 ; v1@17829.7,4369.7 ccw(c17816.89,4356.89) 17816.89,4375 ccw(c17816.89,4393.11) v1@17829.7,4380.3 ; C14.2@17833.81,4472.18 cw(c17843.26,4460.57) v1@17853.85,4471.15 ; C14.2@17836.1,4474.83 cw(c17845.06,4469.51) 17845.06,4479.94 ; C14.2@17836.1,4485.04 ccw(c17845.06,4490.36) 17845.06,4479.94 ; 17843.27,4479.94 cw(c17843.27,4464.47) v1@17857.26,4471.07 ; 17846.01,4478.99 ccw(c17836.23,4469.21) C14.2@17827.5,4479.94 ; v1@17848.22,4466.8 ccw(c17827.5,4457.03) C14.2@17827.5,4479.94 ; v1@17851.52,4473.48 ccw(c17833.91,4455.88) C14.2@17827.5,4479.94 ; v1(17855,4470) 17845.06,4479.94 ; LSM1.11@17600,4439.06 LSM1.10@17619.69,4439.06 LSM1.9@17639.37,4439.06 17644.06,4439.06 17659.06,4424.06 LSM1.8@17659.06,4399.69 17700.31,4399.69 17744.39,4355.61 ; 17744.39,4355.61 *U1.9@17781.61,4355.61 ; C14.2@17827.5,4479.94 17845.06,4479.94
  Bottom Layer w10: C10.2@17657.46,4474.65 cw(c17629.86,4447.05) 17668.9,4447.05 ; C10.2@17661,4480 17668.9,4472.1 U1.12@17668.9,4400.47 ; C10.2@17664.54,4481.72 cw(c17654,4471.19) C10.2@17668.9,4471.19 ; v1@17810.32,3920.86 ccw(c17794.21,3941) R1.1@17820,3941 17820,3920 v1(17815,3915) ; R1.1@17816.46,3937.46 cw(c17807.93,3928.93) 17820,3928.93 cw(c17832.07,3928.93) R1.1@17823.54,3937.46 ; U1.18@17820.47,4307.95 17772.05,4307.95 17760,4320 17760,4340 17795,4375 v1(17835,4375) ; v1@17829.7,4369.7 ccw(c17816.89,4356.89) 17816.89,4375 ccw(c17816.89,4393.11) v1@17829.7,4380.3
  Bottom Layer w40: P1.1@16855,3710 P13.3@16855,3810 P14.3@16855,3910 P6.3@16855,4010 P8.3@16855,4110 P2.3@16855,4210 P3.3@16855,4310 P4.3@16855,4410 P5.3@16855,4510 16855,4610 16890,4645 17680,4645 ; DCDC1.2@17680,4560 17680,4645 ; 18115,4645 17680,4645 ; pad.0@18235,4645 pad.0@18250,4630 18310,4570 P15.3@18310,4520 P12.3@18310,4420 P11.3@18310,4320 P10.3@18310,4220 P9.3@18310,4120 P7.3@18310,4020 P17.3@18310,3920 P18.3@18310,3820 P16.3@18310,3720 ; pad.0@18278.79,4608.79 cw(c18203.43,4533.43) P15.3@18310,4533.43 ; pad.0@18288.11,4602.46 cw(c18273.75,4569.17) 18310,4569.17
  Bottom Layer w100: 18115,4630 pad.0@18250,4630
  other v1: 17350,3685 17640,3685 17855,3690 17130,3755 17740,3760 17850,3780 17185,3960 17115,4060 17120,4155 17165,4345 17230,4535 17145,4575
GROUND1: R26.2 U1.23 | length 1328.7
  Top Layer w10: v1@17179.7,3782.3 ccw(c17169.31,3792.69) 17184,3792.69 ; R26.2@17180.46,3809.65 cw(c17171.93,3801.12) 17184,3801.12 cw(c17196.07,3801.12) R26.2@17187.54,3809.65 ; 17184,3797.52 ccw(c17205.52,3797.52) v1@17190.3,3782.3 ; R26.2@17184,3815 17184,3776 v1(17185,3777)
  Mid-Layer 1 w10: v1@17177.5,3777 ccw(c17159.39,3777) 17172.2,3789.8 ccw(c17185,3802.61) v1@17185,3784.5 ; v1(17185,3777) 17140,3822 17140,3900 17160,3920 17260,3920 17330,3990 17715,3990 17755,4030 17755,4085 17690,4150 v1(17690,4215) ; v1@17684.7,4209.7 cw(c17671.89,4196.89) 17690,4196.89 cw(c17708.11,4196.89) v1@17695.3,4209.7
  Bottom Layer w10: v1(17690,4215) 17695.47,4209.53 U1.23@17820.47,4209.53 ; v1@17695.3,4220.3 ccw(c17721.32,4246.32) 17721.32,4209.53
GROUND2: R27.2 U1.20 | length 1188.1
  Top Layer w10: v1@17179.7,3895.3 ccw(c17169.31,3905.69) R27.2@17184,3905.69 ; R27.2@17180.46,3909.65 cw(c17171.93,3901.12) 17184,3901.12 cw(c17196.07,3901.12) R27.2@17187.54,3909.65 ; R27.2@17184,3910.52 ccw(c17205.52,3910.52) v1@17190.3,3895.3 ; R27.2@17184,3915 17184,3891 v1(17185,3890)
  Mid-Layer 1 w10: v1(17185,3890) 17415,3890 17485,3960 17725,3960 17815,4050 17815,4175 v1(17905,4265) ; v1@17190.3,3884.7 cw(c17203.11,3871.89) 17203.11,3890 cw(c17203.11,3908.11) v1@17190.3,3895.3 ; v1@17897.5,4265 cw(c17879.39,4265) 17892.2,4252.2 cw(c17905,4239.39) v1@17905,4257.5
  Bottom Layer w10: U1.20@17820.47,4268.58 17901.42,4268.58 v1(17905,4265) ; 17878.24,4268.58 cw(c17878.24,4238.24) v1@17899.7,4259.7
GROUND3: R28.2 U1.21 | length 987.5
  Top Layer w10: v1(17855,3920) R28.2@17972,3920 ; v1@17860.3,3914.7 cw(c17873.11,3901.89) 17873.11,3920 cw(c17873.11,3938.11) v1@17860.3,3925.3 ; R28.2@17968.46,3916.46 ccw(c17959.93,3907.93) 17959.93,3920 ccw(c17959.93,3932.07) R28.2@17968.46,3923.54
  Mid-Layer 2 w10: v1(17680,4305) 17725,4305 17925,4105 17925,3935 17910,3920 v1(17855,3920) ; v1@17685.3,4299.7 cw(c17698.11,4286.89) 17698.11,4305 cw(c17698.11,4323.11) v1@17685.3,4310.3 ; v1@17860.3,3914.7 cw(c17873.11,3901.89) 17873.11,3920 cw(c17873.11,3938.11) v1@17860.3,3925.3
  Bottom Layer w10: v1(17680,4305) 17710,4305 17766.1,4248.9 U1.21@17820.47,4248.9 ; v1@17685.3,4299.7 cw(c17698.11,4286.89) 17698.11,4305 cw(c17698.11,4323.11) v1@17685.3,4310.3
GROUND4: R29.2 U1.22 | length 663.5
  Mid-Layer 2 w10: v1@17890,4197.5 cw(c17890,4179.39) 17902.8,4192.2 cw(c17915.61,4205) v1@17897.5,4205 ; v1(17890,4205) 17930,4165 17970,4125 17970,3875 v1(17930,3835) ; v1@17930,3842.5 ccw(c17930,3860.61) 17942.8,3847.8 ccw(c17955.61,3835) v1@17937.5,3835
  Bottom Layer w10: U1.22@17820.47,4229.21 17885.79,4229.21 17890,4225 v1(17890,4205) ; v1@17884.7,4210.3 ccw(c17871.89,4223.11) 17890,4223.11 ccw(c17908.11,4223.11) v1@17895.3,4210.3 ; v1(17930,3835) 17945,3820 R29.2@17972,3820 ; R29.2@17968.46,3816.46 ccw(c17959.93,3807.93) 17959.93,3820 ccw(c17959.93,3832.07) R29.2@17968.46,3823.54
LED_B: U1.9
LED_G: R30.1 U1.8 | length 1930.6
  Mid-Layer 2 w10: v1@17635,4507.5 cw(c17635,4489.39) 17647.8,4502.2 cw(c17660.61,4515) v1@17642.5,4515 ; v1(17635,4515) 17695,4455 17830,4455 18005,4280 18005,4230 18045,4190 18045,3985 18060,3970 18240,3970 18260,3950 18260,3680 18250,3670 v1(18165,3670) ; v1@18170.3,3664.7 cw(c18183.11,3651.89) 18183.11,3670 cw(c18183.11,3688.11) v1@18170.3,3675.3
  Bottom Layer w10: U1.8@17590.16,4400.47 17590.16,4470.16 v1(17635,4515) ; v1@17627.5,4515 cw(c17609.39,4515) 17622.2,4502.2 cw(c17635,4489.39) v1@17635,4507.5 ; R30.1@17916.46,3717.46 cw(c17907.93,3708.93) 17920,3708.93 cw(c17932.07,3708.93) R30.1@17923.54,3717.46 ; R30.1@17920,3721 17920,3685 17935,3670 v1(18165,3670) ; v1@18159.7,3664.7 ccw(c18146.89,3651.89) 18146.89,3670 ccw(c18146.89,3688.11) v1@18159.7,3675.3